# Altium PCB BRD110709.pcbdoc
Units mil, origin at the board's own origin, x right, y up, seen from the top; angles counter-clockwise.
Board outline 7874.02 x 590.55 mil, 2 copper layers (Top Layer, Bottom Layer); 88 components, 67 nets, 293 pads, 105 vias.
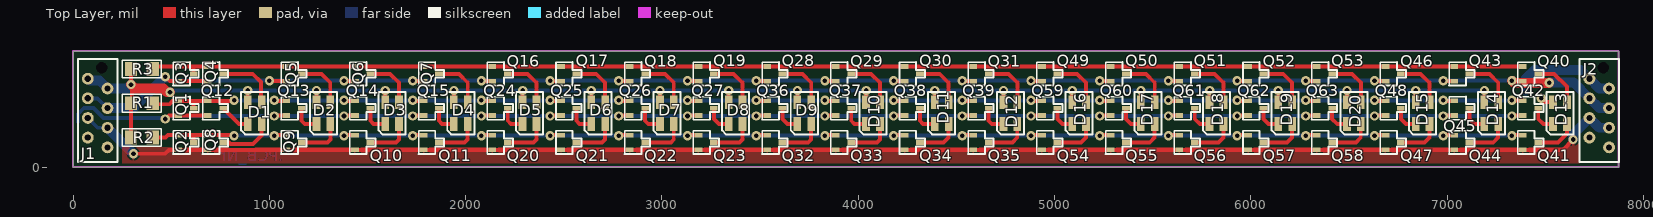
[diagram p0: Top Layer view]
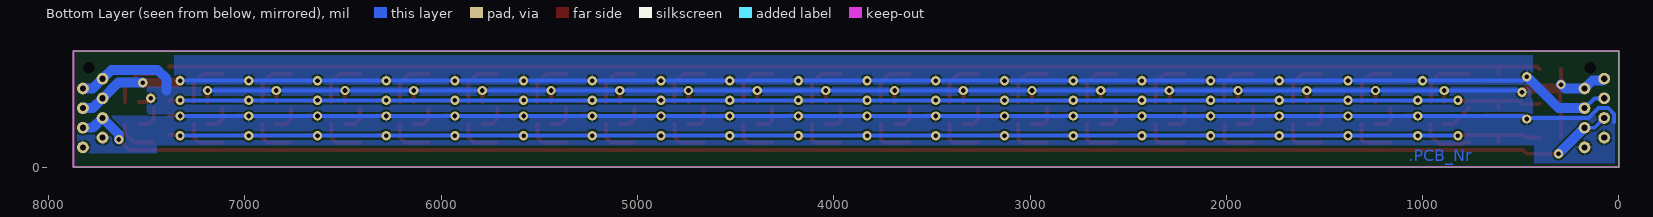
[diagram p1: Bottom Layer view, seen from below]
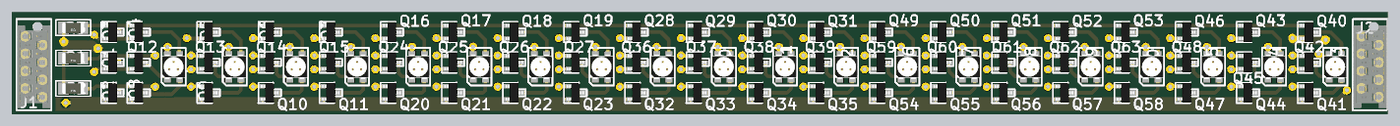
[diagram p2: 3D render of the assembled board from above, using the file's embedded part models]

## Layer stack, top to bottom
Top Layer: signal copper 1.4
Dielectric: dielectric 12.6, FR-4, Dk 4.8
Bottom Layer: signal copper 1.4

## Board outline
0,0 7874.02,0 7874.02,590.55 0,590.55

## Design rules (kind name [scope] priority, off if disabled: settings)
Clearance Clearance_BoardEdge [InPolygon vs (OnLayer('Keep-Out Layer'))] p1: gap=15
Clearance Clearance_1 [All] p2: gap=10
HoleSize [All] p1: absolutevalues=TRUE maxlimit=118.11 minlimit=23.62 maxpercent=80.000 minpercent=20.000
MinimumAnnularRing [All] p1: minimumring=10
PolygonConnect [All] p1: connectstyle=Relief reliefconductorwidth=10 reliefentries=4 polygonreliefangle="90 Angle"
RoutingVias [All] p1: holewidth=23.62 width=47.24 viastyle="Through Hole" minholewidth=23.62 minwidth=47.24 maxholewidth=23.62 maxwidth=47.24
SilkscreenOverComponentPads [All] p1: minsilkscreentomaskgap=10
SolderMaskExpansion [All] p1: expansion=4
Width [All] p1: maxlimit=100 minlimit=10 preferedwidth=20
26 further rules are at their usual default settings.

## Components (designator, comment, footprint, x,y, rotation, side; value= is the part's Value field where it differs from the comment)
D1 "NECM325C" D_PLCC4 925,275 r270 top
D2 "NECM325C" D_PLCC4 1275,275 r270 top
D3 "NECM325C" D_PLCC4 1625,275 r270 top
D4 "NECM325C" D_PLCC4 1975,275 r270 top
D5 "NECM325C" D_PLCC4 2325,275 r270 top
D6 "NECM325C" D_PLCC4 2675,275 r270 top
D7 "NECM325C" D_PLCC4 3025,275 r270 top
D8 "NECM325C" D_PLCC4 3375,275 r270 top
D9 "NECM325C" D_PLCC4 3725,275 r270 top
D10 "NECM325C" D_PLCC4 4075,275 r270 top
D11 "NECM325C" D_PLCC4 4425,275 r270 top
D12 "NECM325C" D_PLCC4 4775,275 r270 top
D13 "NECM325C" D_PLCC4 7575,275 r270 top
D14 "NECM325C" D_PLCC4 7225,275 r270 top
D15 "NECM325C" D_PLCC4 6875,275 r270 top
D16 "NECM325C" D_PLCC4 5125,275 r270 top
D17 "NECM325C" D_PLCC4 5475,275 r270 top
D18 "NECM325C" D_PLCC4 5825,275 r270 top
D19 "NECM325C" D_PLCC4 6175,275 r270 top
D20 "NECM325C" D_PLCC4 6525,275 r270 top
J1 "CNFLC08M_TBD" J_215079-8 75,450 r90 top
J2 "CNFLC08M_TBD" J_215079-8 7725,450 r90 top
Q1 "BC847" SOT23 575,300 r0 top
Q2 "BC847" SOT23 575,125 r0 top
Q3 "BC847" SOT23 575,475 r0 top
Q4 "BC847" SOT23 725,475 r0 top
Q5 "BC847" SOT23 1125,475 r0 top
Q6 "BC847" SOT23 1475,475 r0 top
Q7 "BC847" SOT23 1825,475 r0 top
Q8 "BC847" SOT23 725,125 r0 top
Q9 "BC847" SOT23 1125,125 r0 top
Q10 "BC847" SOT23 1475,125 r0 top
Q11 "BC847" SOT23 1825,125 r0 top
Q12 "BC847" SOT23 725,300 r0 top
Q13 "BC847" SOT23 1125,300 r0 top
Q14 "BC847" SOT23 1475,300 r0 top
Q15 "BC847" SOT23 1825,300 r0 top
Q16 "BC847" SOT23 2175,475 r0 top
Q17 "BC847" SOT23 2525,475 r0 top
Q18 "BC847" SOT23 2875,475 r0 top
Q19 "BC847" SOT23 3225,475 r0 top
Q20 "BC847" SOT23 2175,125 r0 top
Q21 "BC847" SOT23 2525,125 r0 top
Q22 "BC847" SOT23 2875,125 r0 top
Q23 "BC847" SOT23 3225,125 r0 top
Q24 "BC847" SOT23 2175,300 r0 top
Q25 "BC847" SOT23 2525,300 r0 top
Q26 "BC847" SOT23 2875,300 r0 top
Q27 "BC847" SOT23 3225,300 r0 top
Q28 "BC847" SOT23 3575,475 r0 top
Q29 "BC847" SOT23 3925,475 r0 top
Q30 "BC847" SOT23 4275,475 r0 top
Q31 "BC847" SOT23 4625,475 r0 top
Q32 "BC847" SOT23 3575,125 r0 top
Q33 "BC847" SOT23 3925,125 r0 top
Q34 "BC847" SOT23 4275,125 r0 top
Q35 "BC847" SOT23 4625,125 r0 top
Q36 "BC847" SOT23 3575,300 r0 top
Q37 "BC847" SOT23 3925,300 r0 top
Q38 "BC847" SOT23 4275,300 r0 top
Q39 "BC847" SOT23 4625,300 r0 top
Q40 "BC847" SOT23 7425,475 r0 top
Q41 "BC847" SOT23 7425,125 r0 top
Q42 "BC847" SOT23 7425,300 r0 top
Q43 "BC847" SOT23 7075,475 r0 top
Q44 "BC847" SOT23 7075,125 r0 top
Q45 "BC847" SOT23 7075,300 r0 top
Q46 "BC847" SOT23 6725,475 r0 top
Q47 "BC847" SOT23 6725,125 r0 top
Q48 "BC847" SOT23 6725,300 r0 top
Q49 "BC847" SOT23 4975,475 r0 top
Q50 "BC847" SOT23 5325,475 r0 top
Q51 "BC847" SOT23 5675,475 r0 top
Q52 "BC847" SOT23 6025,475 r0 top
Q53 "BC847" SOT23 6375,475 r0 top
Q54 "BC847" SOT23 4975,125 r0 top
Q55 "BC847" SOT23 5325,125 r0 top
Q56 "BC847" SOT23 5675,125 r0 top
Q57 "BC847" SOT23 6025,125 r0 top
Q58 "BC847" SOT23 6375,125 r0 top
Q59 "BC847" SOT23 4975,300 r0 top
Q60 "BC847" SOT23 5325,300 r0 top
Q61 "BC847" SOT23 5675,300 r0 top
Q62 "BC847" SOT23 6025,300 r0 top
Q63 "BC847" SOT23 6375,300 r0 top
R1 "220E/1206" R_1206 350,325 r180 top
R2 "430E/1206" R_1206 350,150 r180 top
R3 "430E/1206" R_1206 350,500 r180 top

## Footprints (in the part's own frame and the unit in brackets; to place one, negate y for a bottom-side part, rotate by r counter-clockwise, add the part's x,y. Pads: shape width x height; smd on the part's side, far side on the other; paste and mask are expansions set on the pad)
D_PLCC4 [mm] "RGB-LED"
  rect 1.8x1 smd: 1(1.4,-0.9) 2(1.4,0.9) 3(-1.4,0.9) 4(-1.4,-0.9)
  silkscreen extent -2.75,-1.75 2.75,1.75, body extent -1.8,-1.7 1.8,1.7, height 2
J_215079-8 [mil] "MicroMatch 8p through hole vertical"
  round 0 hole 59.06 unplated mask+29.53: 0(55.12,-70.87)
  round 60 hole 31.5: 1(0,0) 2(-50,-100) 3(-100,0) 4(-150,-100) 5(-200,0) 6(-250,-100) 7(-300,0) 8(-350,-100)
  silkscreen extent -425,-150 100,50, body extent -413,-148 63,48, height 157
R_1206 [mm] "Chip Resistor; Body 3.2 x 1.6 mm (LxW typ)"
  rect 1.6x1.8 smd: 1(-1.4,0) 2(1.4,0)
  silkscreen extent -2.54,-1.14 2.54,1.14, body extent -1.6,-0.8 1.6,0.8, height 1
SOT23 [mm] "SOT23, 3-Leads, Body 2.9x1.3mm, Pitch 0.95mm, Lead Span 2.3mm, IPC High Density"
  rect 1x0.6 smd: 1(-1,0.95) 2(-1,-0.95) 3(1,0)
  silkscreen extent -1.65,-1.5 1.65,1.5, body extent -1.27,-1.46 1.27,1.46, height 0.99

## Part data
J1 J2: library part CNFLC08F_TBD, "*"
Q1 Q2 Q3 Q4 Q5 Q6 Q7 Q8 Q9 Q10 Q11 Q12 Q13 Q14 Q15 Q16 Q17 Q18 Q19 Q20 Q21 Q22 Q23 Q24 Q25 Q26 Q27 Q28 Q29 Q30 Q31 Q32 Q33 Q34 Q35 Q36 Q37 Q38 Q39 Q40 Q41 Q42 Q43 Q44 Q45 Q46 Q47 Q48 Q49 Q50 Q51 Q52 Q53 Q54 Q55 Q56 Q57 Q58 Q59 Q60 Q61 Q62 Q63: "Amplifier Transistor NPN Silicon"
R1: library part YRES220_1206, "Resistor"
R2 R3: library part YRES430E_TBD, "Resistor"

## Via types
v1: diameter 47.24, hole 23.62, Top Layer to Bottom Layer, 105 vias

## Nets (pads, with @x,y where several pads share a name; then routed paths per layer and width w, separated by ;. In a path a pad name is that pad's centre, name@x,y a point inside that pad or via, vN(x,y) a via of type N, cw(c..) or ccw(c..) an arc to the next point about the centre after c; other vN are vias at no path point)
+5V: D1.4 D2.4 D3.4 D4.4 D5.4 D6.4 D7.4 D8.4 D9.4 D10.4 D11.4 D12.4 D13.4 D14.4 D15.4 D16.4 D17.4 D18.4 D19.4 D20.4 J1.1 J1.2 J2.1 J2.2 R1.2 R2.2 R3.2 | length 9301.5
  Top Layer w20: R2.2 R1.2 300,330.12 v1@300,414.89 ; v1@294.89,405.11 v1(294.89,420) R3.2 ; D1.4 889.57,389.57 v1(890,390) ; D2.4 1239.57,389.57 v1(1240,390) ; D3.4 1589.57,389.57 v1(1590,390) ; D4.4 1939.57,389.57 v1(1940,390) ; D5.4 2289.57,389.57 v1(2290,390) ; D6.4 2639.57,389.57 v1(2640,390) ; D7.4 2989.57,389.57 v1(2990,390) ; D8.4 3339.57,389.57 v1(3340,390) ; D9.4 3689.57,389.57 v1(3690,390) ; D10.4 4039.57,389.57 v1(4040,390) ; D11.4 4389.57,389.57 v1(4390,390) ; D12.4 4739.57,389.57 v1(4740,390) ; D16.4 5089.57,389.57 v1(5090,390) ; D17.4 5439.57,389.57 v1(5440,390) ; D18.4 5789.57,389.57 v1(5790,390) ; D19.4 6139.57,389.57 v1(6140,390) ; D20.4 6489.57,389.57 v1(6490,390) ; D15.4 6839.57,389.57 v1(6840,390) ; D14.4 7189.57,389.57 v1(7190,390) ; v1(7480,350) 7499.45,330.55 7540,330.55 D13.4
  Top Layer w50: v1(294.89,420) 300,414.89 314.89,400 460,400 478.98,381.02 v1(493.93,381.02)
  Bottom Layer w20: v1@294.89,405.11 v1(294.89,420) ; v1@480.24,381.02 v1(493.93,381.02) ; v1@500,380 510,390 v1(890,390) v1(1240,390) v1(1590,390) v1(1940,390) v1(2290,390) v1(2640,390) v1(2990,390) v1(3340,390) v1(3690,390) v1(4040,390) v1(4390,390) v1(4740,390) v1(5090,390) v1(5440,390) v1(5790,390) v1(6140,390) v1(6490,390) v1(6840,390) v1(7190,390)
  Bottom Layer w50: J1.1 84.41,440.59 134.41,440.59 J1.2 274.89,400 v1(294.89,420) ; 7400,390 7400,450 7445,495 7680,495 J2.1 7775,400 J2.2
NetD1_1: D1.1 Q12.3 | length 158.4
  Top Layer w20: Q12.3 844.49,219.88 D1.1
NetD1_2: D1.2 Q8.3 | length 277.3
  Top Layer w20: Q8.3 793.31,125 801.93,116.38 916.38,116.38 960.43,160.43 D1.2
NetD1_3: D1.3 Q4.3 | length 314.3
  Top Layer w20: Q4.3 915,475 956.38,433.62 956.38,334.17 D1.3
NetD2_1: D2.1 Q13.3 | length 146.1
  Top Layer w20: Q13.3 1164.37,235.63 1180,220 1239.45,220 D2.1
NetD2_2: D2.2 Q9.3 | length 231.9
  Top Layer w20: Q9.3 1295,125 1310.43,140.43 D2.2
NetD2_3: D2.3 Q5.3 | length 264.2
  Top Layer w20: Q5.3 1265,475 1310,430 D2.3@1310,330.12
NetD3_1: D3.1 Q14.3 | length 146.1
  Top Layer w20: Q14.3 1514.37,235.63 1530,220 1589.45,220 D3.1
NetD3_2: D3.2 Q10.3 | length 231.9
  Top Layer w20: Q10.3 1645,125 1660,140 1660,219.45 D3.2
NetD3_3: D3.3 Q6.3 | length 264.3
  Top Layer w20: Q6.3 1615,475 1660.43,429.57 D3.3
NetD4_1: D4.1 Q15.3 | length 146.1
  Top Layer w20: Q15.3 1864.37,235.63 1880,220 1939.45,220 D4.1
NetD4_2: D4.2 Q11.3 | length 231.9
  Top Layer w20: Q11.3 1995,125 2010,140 2010,219.45 D4.2
NetD4_3: D4.3 Q7.3 | length 264.3
  Top Layer w20: Q7.3 1965,475 2010.43,429.57 D4.3
NetD5_1: D5.1 Q24.3 | length 146.1
  Top Layer w20: Q24.3 2214.37,235.63 2230,220 2289.45,220 D5.1
NetD5_2: D5.2 Q20.3 | length 231.9
  Top Layer w20: Q20.3 2345,125 2360,140 2360,219.45 D5.2
NetD5_3: D5.3 Q16.3 | length 264.3
  Top Layer w20: Q16.3 2315,475 2360.43,429.57 D5.3
NetD6_1: D6.1 Q25.3 | length 146.1
  Top Layer w20: Q25.3 2564.37,235.63 2580,220 2639.45,220 D6.1
NetD6_2: D6.2 Q21.3 | length 231.9
  Top Layer w20: Q21.3 2695,125 2710,140 2710,219.45 D6.2
NetD6_3: D6.3 Q17.3 | length 264.3
  Top Layer w20: Q17.3 2665,475 2710.43,429.57 D6.3
NetD7_1: D7.1 Q26.3 | length 146.1
  Top Layer w20: Q26.3 2914.37,235.63 2930,220 2989.45,220 D7.1
NetD7_2: D7.2 Q22.3 | length 231.9
  Top Layer w20: Q22.3 3045,125 3060,140 3060,219.45 D7.2
NetD7_3: D7.3 Q18.3 | length 264.3
  Top Layer w20: Q18.3 3015,475 3060,430 3060,330.55 D7.3
NetD8_1: D8.1 Q27.3 | length 140.2
  Top Layer w20: Q27.3 3264.37,245.63 3290,220 3339.45,220 D8.1
NetD8_2: D8.2 Q23.3 | length 231.9
  Top Layer w20: Q23.3 3395,125 3410,140 3410,219.45 D8.2
NetD8_3: D8.3 Q19.3 | length 264.3
  Top Layer w20: Q19.3 3365,475 3410.43,429.57 D8.3
NetD9_1: D9.1 Q36.3 | length 140.2
  Top Layer w20: Q36.3 3614.37,245.63 3640,220 3689.45,220 D9.1
NetD9_2: D9.2 Q32.3 | length 231.9
  Top Layer w20: Q32.3 3745,125 3760,140 3760,219.45 D9.2
NetD9_3: D9.3 Q28.3 | length 264.3
  Top Layer w20: Q28.3 3715,475 3760.43,429.57 D9.3
NetD10_1: D10.1 Q37.3 | length 146.1
  Top Layer w20: Q37.3 3964.37,235.63 3980,220 4039.45,220 D10.1
NetD10_2: D10.2 Q33.3 | length 231.9
  Top Layer w20: Q33.3 4095,125 4110,140 4110,219.45 D10.2
NetD10_3: D10.3 Q29.3 | length 264.3
  Top Layer w20: Q29.3 4065,475 4110.43,429.57 D10.3
NetD11_1: D11.1 Q38.3 | length 146.1
  Top Layer w20: Q38.3 4314.37,235.63 4330,220 4389.45,220 D11.1
NetD11_2: D11.2 Q34.3 | length 226
  Top Layer w20: Q34.3 4435,125 4460,150 4460,219.45 D11.2
NetD11_3: D11.3 Q30.3 | length 264.3
  Top Layer w20: Q30.3 4415,475 4460.43,429.57 D11.3
NetD12_1: D12.1 Q39.3 | length 146.1
  Top Layer w20: Q39.3 4664.37,235.63 4680,220 4739.45,220 D12.1
NetD12_2: D12.2 Q35.3 | length 226
  Top Layer w20: Q35.3 4785,125 4810,150 4810,219.45 D12.2
NetD12_3: D12.3 Q31.3 | length 264.3
  Top Layer w20: Q31.3 4765,475 4810.43,429.57 D12.3
NetD13_1: D13.1 Q42.3 | length 140.2
  Top Layer w20: Q42.3 7464.37,245.63 7490,220 7539.45,220 D13.1
NetD13_2: D13.2 Q41.3 | length 214.3
  Top Layer w20: Q41.3 7565,125 7610.43,170.43 D13.2
NetD13_3: D13.3 Q40.3 | length 252.6
  Top Layer w20: Q40.3 7545,475 7610.43,409.57 D13.3
NetD14_1: D14.1 Q45.3 | length 140.2
  Top Layer w20: Q45.3 7114.37,245.63 7140,220 7189.45,220 D14.1
NetD14_2: D14.2 Q44.3 | length 226
  Top Layer w20: Q44.3 7235,125 7260,150 7260,219.45 D14.2
NetD14_3: D14.3 Q43.3 | length 264.3
  Top Layer w20: Q43.3 7215,475 7260.43,429.57 D14.3
NetD15_1: D15.1 Q48.3 | length 140.2
  Top Layer w20: Q48.3 6764.37,245.63 6790,220 6839.45,220 D15.1
NetD15_2: D15.2 Q47.3 | length 226
  Top Layer w20: Q47.3 6885,125 6910,150 6910,219.45 D15.2
NetD15_3: D15.3 Q46.3 | length 264.3
  Top Layer w20: Q46.3 6865,475 6910.43,429.57 D15.3
NetD16_1: D16.1 Q59.3 | length 140.2
  Top Layer w20: Q59.3 5014.37,245.63 5040,220 5089.45,220 D16.1
NetD16_2: D16.2 Q54.3 | length 226
  Top Layer w20: Q54.3 5135,125 5160,150 5160,219.45 D16.2
NetD16_3: D16.3 Q49.3 | length 264.3
  Top Layer w20: Q49.3 5115,475 5160.43,429.57 D16.3
NetD17_1: D17.1 Q60.3 | length 140.2
  Top Layer w20: Q60.3 5364.37,245.63 5390,220 5439.45,220 D17.1
NetD17_2: D17.2 Q55.3 | length 226
  Top Layer w20: Q55.3 5485,125 5510,150 5510,219.45 D17.2
NetD17_3: D17.3 Q50.3 | length 264.3
  Top Layer w20: Q50.3 5465,475 5510.43,429.57 D17.3
NetD18_1: D18.1 Q61.3 | length 140.2
  Top Layer w20: Q61.3 5714.37,245.63 5740,220 5789.45,220 D18.1
NetD18_2: D18.2 Q56.3 | length 226
  Top Layer w20: Q56.3 5835,125 5860,150 5860,219.45 D18.2
NetD18_3: D18.3 Q51.3 | length 264.3
  Top Layer w20: Q51.3 5815,475 5860.43,429.57 D18.3
NetD19_1: D19.1 Q62.3 | length 140.2
  Top Layer w20: Q62.3 6064.37,245.63 6090,220 6139.45,220 D19.1
NetD19_2: D19.2 Q57.3 | length 226
  Top Layer w20: Q57.3 6185,125 6210,150 6210,219.45 D19.2
NetD19_3: D19.3 Q52.3 | length 264.3
  Top Layer w20: Q52.3 6165,475 6210.43,429.57 D19.3
NetD20_1: D20.1 Q63.3 | length 140.2
  Top Layer w20: Q63.3 6414.37,245.63 6440,220 6489.45,220 D20.1
NetD20_2: D20.2 Q58.3 | length 226
  Top Layer w20: Q58.3 6535,125 6560,150 6560,219.45 D20.2
NetD20_3: D20.3 Q53.3 | length 264.3
  Top Layer w20: Q53.3 6515,475 6560.43,429.57 D20.3
NetJ1_3: J1.3 J1.4 J2.3 J2.4 Q3.2 Q4.2 Q5.2 Q6.2 Q7.2 Q16.2 Q17.2 Q18.2 Q19.2 Q28.2 Q29.2 Q30.2 Q31.2 Q40.2 Q43.2 Q46.2 Q49.2 Q50.2 Q51.2 Q52.2 Q53.2 | length 9219.6
  Top Layer w20: v1(470,460) 492.4,437.6 Q3.2 Q4.2 ; v1(1000,440) 1002.4,437.6 Q5.2 ; v1(1380,440) 1382.4,437.6 Q6.2 ; v1(1730,440) 1732.4,437.6 Q7.2 ; v1(2080,440) 2082.4,437.6 Q16.2 ; v1(2430,440) 2432.4,437.6 Q17.2 ; v1(2780,440) 2782.4,437.6 Q18.2 ; v1(3130,440) 3132.4,437.6 Q19.2 ; v1(3480,440) 3482.4,437.6 Q28.2 ; v1(3830,440) 3832.4,437.6 Q29.2 ; v1(4180,440) 4182.4,437.6 Q30.2 ; v1(4530,440) 4532.4,437.6 Q31.2 ; v1(4880,440) 4882.4,437.6 Q49.2 ; v1(5230,440) 5232.4,437.6 Q50.2 ; v1(5580,440) 5582.4,437.6 Q51.2 ; v1(5930,440) 5932.4,437.6 Q52.2 ; v1(6280,440) 6282.4,437.6 Q53.2 ; v1(6630,440) 6632.4,437.6 Q46.2 ; v1(6980,440) 6982.4,437.6 Q43.2 ; v1@7332.4,437.6 Q40.2 ; v1@7512.4,437.6 v1(7520,430)
  Top Layer w50: v1(7330,440) 7332.4,437.6 7341.81,428.19 7518.19,428.19 v1(7520,430)
  Bottom Layer w20: J1.3 125,350 J1.4 ; v1@470,440 v1(1000,440) v1(1380,440) v1(1730,440) v1(2080,440) v1(2430,440) v1(2780,440) v1(3130,440) v1(3480,440) v1(3830,440) v1(4180,440) v1(4530,440) v1(4880,440) v1(5230,440) v1(5580,440) v1(5930,440) v1(6280,440) v1(6630,440) v1(6980,440) v1(7330,440)
  Bottom Layer w50: J1.4 307.1,300 v1@458.55,451.45 ; v1(7520,430) 7645,430 J2.3 7775,300 J2.4
NetJ1_5: J1.5 J1.6 J2.5 J2.6 Q2.2 Q8.2 Q9.2 Q10.2 Q11.2 Q20.2 Q21.2 Q22.2 Q23.2 Q32.2 Q33.2 Q34.2 Q35.2 Q41.2 Q44.2 Q47.2 Q54.2 Q55.2 Q56.2 Q57.2 Q58.2 | length 8027.9
  Top Layer w20: v1(307.5,67.5) 467.5,67.5 487.6,87.6 Q2.2 Q8.2 788.28,87.6 789.5,86.38 1109.41,86.38 ; Q9.2@1084.41,86.38 Q9.2 ; 1110.63,87.6 Q10.2 Q11.2 Q20.2 Q21.2 Q22.2 3235.63,87.6 ; Q23.2 3585.63,87.6 ; Q32.2 Q33.2 Q34.2 Q35.2 Q55.2 Q47.2 Q41.2@7375,87.6 ; Q41.2 7589.29,87.6 v1(7641.69,140)
  Bottom Layer w20: J1.5 125,200 J1.6
  Bottom Layer w50: J1.6 v1(307.5,67.5) ; v1(7641.69,140) 7641.69,166.69 J2.5 7775,200 J2.6
NetJ1_7: J1.7 J1.8 J2.7 J2.8 Q1.2 Q12.2 Q13.2 Q14.2 Q15.2 Q24.2 Q25.2 Q26.2 Q27.2 Q36.2 Q37.2 Q38.2 Q39.2 Q42.2 Q45.2 Q48.2 Q59.2 Q60.2 Q61.2 Q62.2 Q63.2 | length 8683.7
  Top Layer w20: v1(470,245) 487.6,262.6 Q1.2 Q12.2 ; v1(1025,260) 1027.6,262.6 Q13.2 ; v1(1380,260) 1382.6,262.6 Q14.2 ; v1(1730,260) 1732.6,262.6 Q15.2 ; v1(2080,260) 2082.6,262.6 Q24.2 ; v1(2430,260) 2432.6,262.6 Q25.2 ; v1(2780,260) 2782.6,262.6 Q26.2 ; v1(3130,260) 3132.6,262.6 Q27.2 ; v1(3480,260) 3482.6,262.6 Q36.2 ; v1(3830,260) 3832.6,262.6 Q37.2 ; v1(4180,260) 4182.6,262.6 Q38.2 ; v1(4530,260) 4532.6,262.6 Q39.2 ; v1(4880,260) 4882.6,262.6 Q59.2 ; v1(5230,260) 5232.6,262.6 Q60.2 ; v1(5580,260) 5582.6,262.6 Q61.2 ; v1(5930,260) 5932.6,262.6 Q62.2 ; v1(6280,260) 6282.6,262.6 Q63.2 ; v1(6630,260) 6632.6,262.6 Q48.2 ; v1(6980,260) 6982.6,262.6 Q45.2 ; v1(7330,260) 7332.6,262.6 Q42.2
  Bottom Layer w20: 25,229.29 25,270.71 54.29,300 104.29,300 154.29,250 475,250 485,260 v1(1025,260) v1(1380,260) v1(1730,260) v1(2080,260) v1(2430,260) v1(2780,260) v1(3130,260) v1(3480,260) v1(3830,260) v1(4180,260) v1(4530,260) v1(4880,260) v1(5230,260) v1(5580,260) v1(5930,260) v1(6280,260) v1(6630,260) v1(6980,260) v1@7325,260
NetQ1_1: Q1.1 Q1.3 Q12.1 Q13.1 Q14.1 Q15.1 Q24.1 Q25.1 Q26.1 Q27.1 Q36.1 Q37.1 Q38.1 Q39.1 Q42.1 Q45.1 Q48.1 Q59.1 Q60.1 Q61.1 Q62.1 Q63.1 R1.1 | length 8048.2
  Top Layer w20: R1.1 410.12,320 490,320 507.4,337.4 Q1.1 610,337.4 ; Q1.3 614.37,333.03 610,337.4 ; 710.63,337.4 Q12.1 610,337.4 ; 715.63,337.4 v1@832.4,337.4 ; v1(1025,340) 1027.6,337.4 Q13.1 ; v1(1380,340) 1382.6,337.4 Q14.1 ; v1(1730,340) 1732.6,337.4 Q15.1 ; v1(2080,340) 2082.6,337.4 Q24.1 ; v1(2430,340) 2432.6,337.4 Q25.1 ; v1(2780,340) 2782.6,337.4 Q26.1 ; v1(3130,340) 3132.6,337.4 Q27.1 ; v1(3480,340) 3482.6,337.4 Q36.1 ; v1(3830,340) 3832.6,337.4 Q37.1 ; v1(4180,340) 4182.6,337.4 Q38.1 ; v1(4530,340) 4532.6,337.4 Q39.1 ; v1(4880,340) 4882.6,337.4 Q59.1 ; v1(5230,340) 5232.6,337.4 Q60.1 ; v1(5580,340) 5582.6,337.4 Q61.1 ; v1(5930,340) 5932.6,337.4 Q62.1 ; v1(6280,340) 6282.6,337.4 Q63.1 ; v1(6630,340) 6632.6,337.4 Q48.1 ; v1(6980,340) 6982.6,337.4 Q45.1 ; v1(7330,340) 7383.03,340 Q42.1
  Bottom Layer w20: v1@830,340 v1(1025,340) v1(1380,340) v1(1730,340) v1(2080,340) v1(2430,340) v1(2780,340) v1(3130,340) v1(3480,340) v1(3830,340) v1(4180,340) v1(4530,340) v1(4880,340) v1(5230,340) v1(5580,340) v1(5930,340) v1(6280,340) v1(6630,340) v1(6980,340) v1@7325,340
  other v1: 820,340
NetQ2_1: Q2.1 Q2.3 Q8.1 Q9.1 Q10.1 Q11.1 Q20.1 Q21.1 Q22.1 Q23.1 Q32.1 Q33.1 Q34.1 Q35.1 Q41.1 Q44.1 Q47.1 Q54.1 Q55.1 Q56.1 Q57.1 Q58.1 R2.1 | length 8046.1
  Top Layer w20: R2.1 470,150 482.4,162.4 Q2.1 610,162.4 ; Q2.3 614.37,158.03 610,162.4 ; v1(820,160) 817.6,162.4 Q8.1 610,162.4 ; v1(1025,160) 1027.4,162.4 Q9.1 ; v1(1380,160) 1382.4,162.4 Q10.1 ; v1(1730,160) 1732.4,162.4 Q11.1 ; v1(2080,160) 2082.4,162.4 Q20.1 ; v1(2430,160) 2432.4,162.4 Q21.1 ; v1(2780,160) 2782.4,162.4 Q22.1 ; v1(3130,160) 3132.4,162.4 Q23.1 ; v1(3480,160) 3482.4,162.4 Q32.1 ; v1(3830,160) 3832.4,162.4 Q33.1 ; v1(4180,160) 4182.4,162.4 Q34.1 ; v1(4530,160) 4532.4,162.4 Q35.1 ; v1(4880,160) 4882.4,162.4 Q54.1 ; v1(5230,160) 5232.4,162.4 Q55.1 ; v1(5580,160) 5582.4,162.4 Q56.1 ; v1(5930,160) 5932.4,162.4 Q57.1 ; v1(6280,160) 6282.4,162.4 Q58.1 ; v1(6630,160) 6632.4,162.4 Q47.1 ; v1(6980,160) 6982.4,162.4 Q44.1 ; v1(7330,160) 7332.4,162.4 Q41.1
  Bottom Layer w20: v1(820,160) v1(1025,160) v1(1380,160) v1(1730,160) v1(2080,160) v1(2430,160) v1(2780,160) v1(3130,160) v1(3480,160) v1(3830,160) v1(4180,160) v1(4530,160) v1(4880,160) v1(5230,160) v1(5580,160) v1(5930,160) v1(6280,160) v1(6630,160) v1(6980,160) v1@7325,160
NetQ3_1: Q3.1 Q3.3 Q4.1 Q5.1 Q6.1 Q7.1 Q16.1 Q17.1 Q18.1 Q19.1 Q28.1 Q29.1 Q30.1 Q31.1 Q40.1 Q43.1 Q46.1 Q49.1 Q50.1 Q51.1 Q52.1 Q53.1 R3.1 | length 7124.9
  Top Layer w20: R3.1 417.52,512.4 Q3.1 610,512.4 ; Q3.3 614.37,508.03 610,512.4 ; Q19.1 3585.63,512.4 ; 3235.63,512.4 Q18.1 Q17.1 Q16.1 Q7.1 Q6.1 Q4.1 610,512.4 ; Q28.1 Q29.1 Q30.1 Q31.1 Q51.1 Q53.1 Q40.1
pads on no net: J1.0 J2.0

## Polygon pours and split planes (outlines as drawn)
NetJ1_7 on Bottom Layer " Bottom Layer-NetJ1_7" (solid, remove dead copper, pour order 12): 20,260 20,20 430,20 430,110 7450,110 7450,70 7860,70 7860,260
+5V on Bottom Layer " Bottom Layer-Net+5V" (solid, remove dead copper, pour order 10): 440,410 440,270 7490,270 7500.61,280.61 7500.61,408.36 441.64,408.36 440,410
NetJ1_3 on Bottom Layer "Bottom Layer-NetJ1_3" (solid, remove dead copper, pour order 6): 440,590.55 440,420 7355.94,420 7360,415.94 7360,590 440.55,590 440,590.55
NetJ1_5 on Top Layer "Top Layer-NetJ1_5" (solid, remove dead copper, pour order 8): 250,100 250,0 7670,0 7675,5 7675,170 7605,100 250,100

## Keep-outs
Keep-Out Layer:
  the board outline again, w10

## Other copper
Bottom Layer:
  text ".PCB_Nr" at 1070,30 h60

## Silkscreen, mask and mechanical layers (free items; w line width, h text height)
Mechanical 8:
  the board outline again, w10
Mechanical 16:
  lines w5: -1850.39,-1997.64 -1650.39,-1997.64 ; -1850.39,-97.64 -1650.39,-97.64 ; -1850.39,1802.36 -1650.39,1802.36 ; 1024.61,-3897.64 1024.61,-3697.64 ; 1024.61,3502.36 1024.61,3702.36 ; 3899.61,-3897.64 3899.61,-3697.64 ; 3899.61,3502.36 3899.61,3702.36 ; 4949.61,-3397.64 9449.61,-3397.64 ; 4949.61,-3097.64 9449.61,-3097.64 ; 4949.61,-2797.64 6449.61,-2797.64 ; 6449.61,-3697.64 6449.61,-3097.64 6449.61,-2497.64 ; 6774.61,-3897.64 6774.61,-3697.64 ; 6774.61,3502.36 6774.61,3702.36 ; 8549.61,-3697.64 8549.61,-3097.64 ; 9449.61,-1997.64 9649.61,-1997.64 ; 9449.61,-97.64 9649.61,-97.64 ; 9449.61,1802.36 9649.61,1802.36 ; 4949.61,-3697.64 4949.61,-2497.64 ; 4949.61,-3697.64 9449.61,-3697.64 ; 4949.61,-3697.64 3549.61,-3697.64 3549.61,-2497.64 4949.61,-2497.64 ; 4949.61,-2497.64 6449.61,-2497.64 ; 6449.61,-2497.64 9449.61,-2497.64 9449.61,-3697.64 ; 9449.61,-3697.64 9449.61,3502.36 -1650.39,3502.36 -1650.39,-3697.64 9449.61,-3697.64 ; -1850.39,-3897.64 -1850.39,3702.36 9649.61,3702.36 9649.61,-3897.64 -1850.39,-3897.64
  text "1" at -423.39,3567.36 h70
  text "2" at 2436.61,3567.36 h70
  text "3" at 5316.61,3567.36 h70
  text "4" at 8186.61,3567.36 h70
  text "A" at -1775.39,2661.36 h70
  text "A" at 9524.61,2661.36 h70
  text "B" at -1775.39,769.36 h70
  text "B" at 9524.61,769.36 h70
  text "C" at -1775.39,-1140.64 h70
  text "C" at 9524.61,-1140.64 h70
  text "ENGINEER:" at 4999.61,-2597.64 h45
  text "TITLE:" at 6499.61,-2597.64 h45
  text ".ProjectNaam" at 6714.61,-2857.64 h98.43
  text "PCB DESIGNER:" at 4999.61,-2892.64 h45
  text ".DrawnByX" at 5489.61,-3012.64 h98.43
  text "D" at -1775.39,-3030.64 h70
  text "D" at 9524.61,-3030.64 h70
  text "DATE:" at 4999.61,-3197.64 h45
  text "PART NO.:" at 6499.61,-3197.64 h45
  text "REV:" at 8599.61,-3197.64 h45
  text ".VariantName" at 6904.61,-3297.64 h78.74
  text ".PRINT_DATE" at 5049.61,-3317.64 h70
  text ".RevisionNR" at 8589.61,-3342.64 h98.43
  text "FILE NAME:" at 4999.61,-3497.64 h45
  text "DWG NO:" at 6499.61,-3497.64 h45
  text "SCALE:" at 8599.61,-3497.64 h45
  text ".PCB_FILE_NAME_NO_PATH" at 5049.61,-3617.64 h70
  text ".PCB_Nr" at 6804.61,-3627.64 h98.43
  text "1" at -423.39,-3832.64 h70
  text "2" at 2436.61,-3832.64 h70
  text "3" at 5316.61,-3832.64 h70
  text "4" at 8186.61,-3832.64 h70
Drill Drawing:
  text ".Legend" at 10,-1900 h60
Mechanical 17:
  lines w5: -1845.39,-1997.64 -1645.39,-1997.64 ; -1845.39,-97.64 -1645.39,-97.64 ; -1845.39,1802.36 -1645.39,1802.36 ; -1650.39,-3392.64 2849.61,-3392.64 ; -1650.39,-3092.64 2849.61,-3092.64 ; -750.39,-3692.64 -750.39,-3092.64 ; 1029.61,-3897.64 1029.61,-3697.64 ; 1029.61,3502.36 1029.61,3702.36 ; 1349.61,-3692.64 1349.61,-3092.64 1349.61,-2492.64 ; 1349.61,-2792.64 2849.61,-2792.64 ; 3554.61,-3697.64 4954.61,-3697.64 9454.61,-3697.64 ; 3904.61,-3897.64 3904.61,-3697.64 ; 3904.61,3502.36 3904.61,3702.36 ; 6779.61,-3897.64 6779.61,-3697.64 ; 6779.61,3502.36 6779.61,3702.36 ; 9454.61,-2497.64 9454.61,-3697.64 ; 9454.61,-1997.64 9654.61,-1997.64 ; 9454.61,-97.64 9654.61,-97.64 ; 9454.61,1802.36 9654.61,1802.36 ; 1349.61,-2492.64 2849.61,-2492.64 ; 1349.61,-2492.64 -1650.39,-2492.64 -1650.39,-3692.64 2849.61,-3692.64 ; 2849.61,-3692.64 4249.61,-3692.64 4249.61,-2492.64 2849.61,-2492.64 ; 2849.61,-3692.64 2849.61,-2492.64 ; 9454.61,-3697.64 -1645.39,-3697.64 -1645.39,3502.36 9454.61,3502.36 9454.61,-3697.64 ; -1845.39,-3897.64 9654.61,-3897.64 9654.61,3702.36 -1845.39,3702.36 -1845.39,-3897.64
  text "1" at -418.39,3567.36 h70
  text "2" at 2441.61,3567.36 h70
  text "3" at 5321.61,3567.36 h70
  text "4" at 8191.61,3567.36 h70
  text "A" at -1770.39,2661.36 h70
  text "A" at 9529.61,2661.36 h70
  text "B" at -1770.39,769.36 h70
  text "B" at 9529.61,769.36 h70
  text "C" at -1770.39,-1140.64 h70
  text "C" at 9529.61,-1140.64 h70
  text "TITLE:" at 1299.61,-2592.64 h45
  text "ENGINEER:" at 2799.61,-2592.64 h45
  text ".ProjectNaam" at 1084.61,-2852.64 h98.43
  text "PCB DESIGNER:" at 2799.61,-2887.64 h45
  text ".DrawnByX" at 2309.61,-3007.64 h98.43
  text "D" at -1770.39,-3030.64 h70
  text "D" at 9529.61,-3030.64 h70
  text "REV:" at -800.39,-3192.64 h45
  text "PART NO.:" at 1299.61,-3192.64 h45
  text "DATE:" at 2799.61,-3192.64 h45
  text ".VariantName" at 694.61,-3307.64 h78.74
  text ".PRINT_DATE" at 2749.61,-3312.64 h70
  text ".RevisionNR" at -800.39,-3332.64 h98.43
  text "SCALE:" at -800.39,-3492.64 h45
  text "DWG NO:" at 1299.61,-3492.64 h45
  text "FILE NAME:" at 2799.61,-3492.64 h45
  text ".PCB_FILE_NAME_NO_PATH" at 2749.61,-3612.64 h70
  text ".PCB_Nr" at 994.61,-3622.64 h98.43
  text "1" at -418.39,-3832.64 h70
  text "2" at 2441.61,-3832.64 h70
  text "3" at 5321.61,-3832.64 h70
  text "4" at 8191.61,-3832.64 h70

## Dimensions
0,590.55 to 7874.02,590.55 on Measures
0,590.55 to 0,0 on Measures